# Altium PCB 陈雨笙Test.PcbDoc
Units mil, origin at the board's own origin, x right, y up, seen from the top; angles counter-clockwise.
Board outline 6000 x 4000 mil, 2 copper layers (Top Layer, Bottom Layer); 36 components, 40 nets, 139 pads, 15 vias.
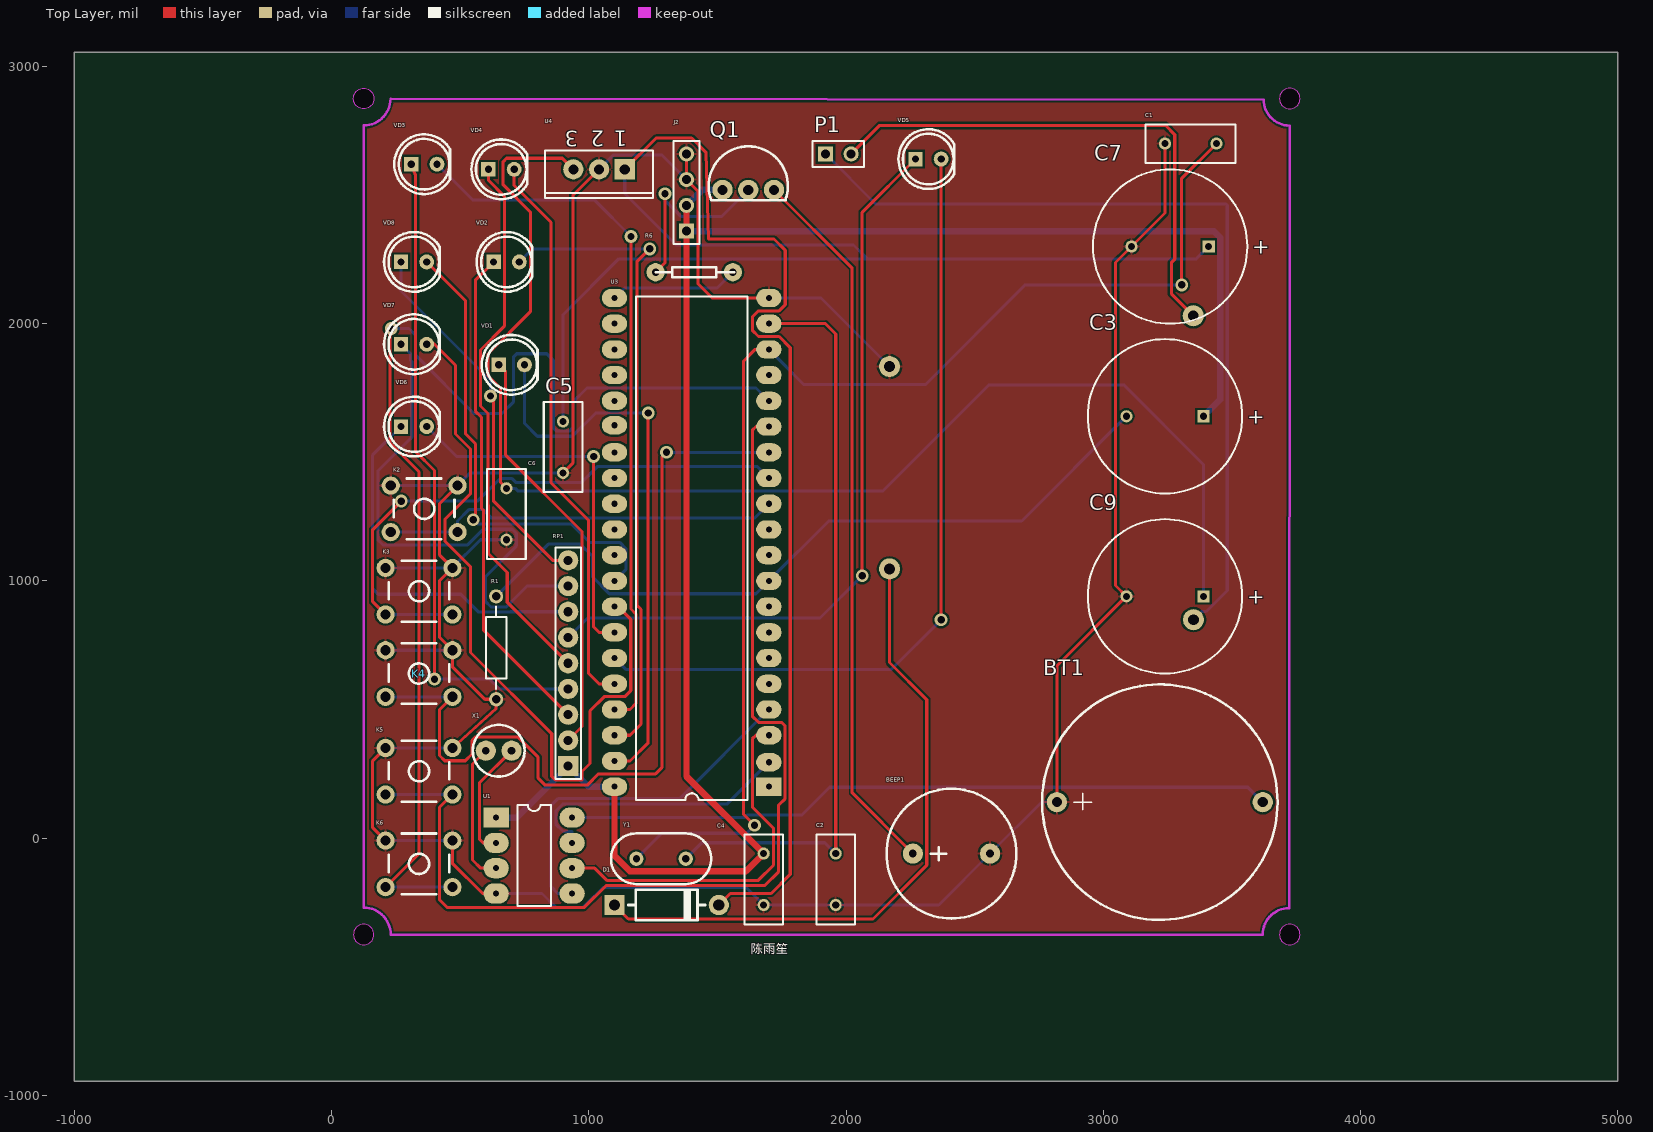
[diagram p0: Top Layer view]
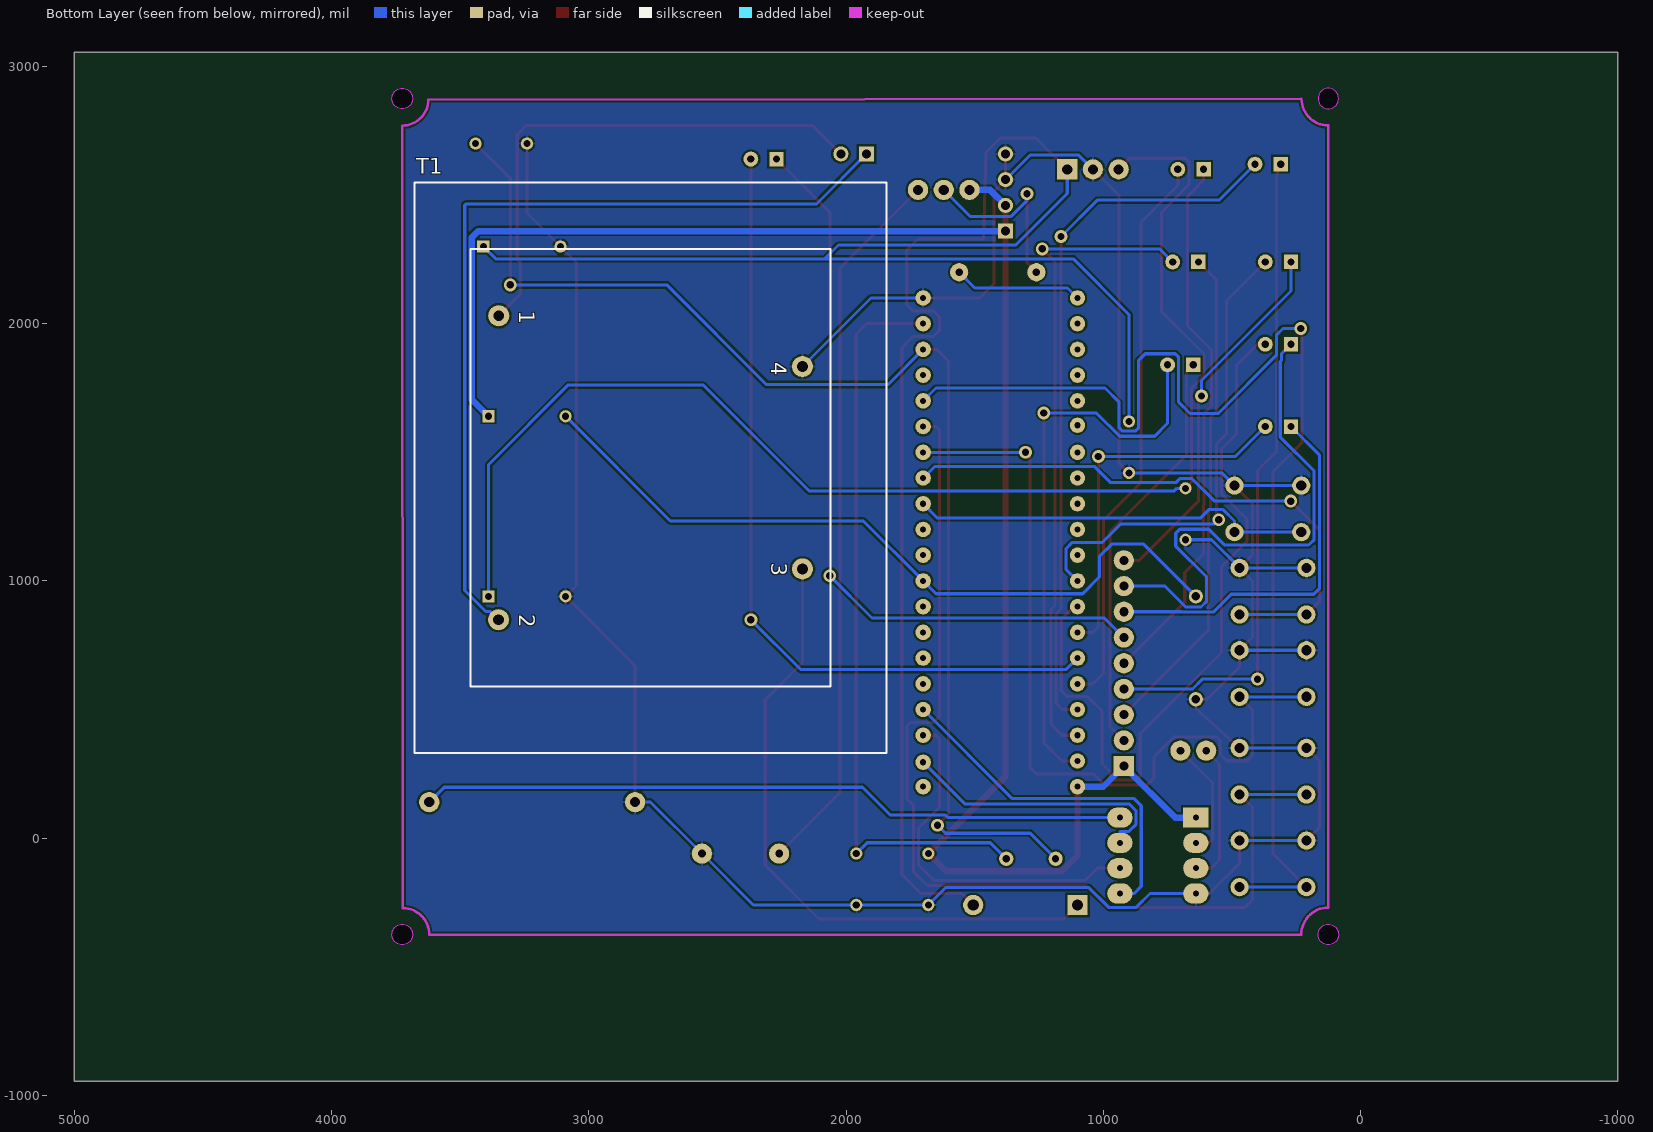
[diagram p1: Bottom Layer view, seen from below]

## Layer stack, top to bottom
Top Layer: signal copper 1.4
Dielectric: dielectric 12.6, FR-4, Dk 4.8
Bottom Layer: signal copper 1.4

## Board outline
-1000,-945 5000,-945 5000,3055 -1000,3055
cut-out: 3685,2875 ccw(c3725,2875) 3725,2835 ccw(c3725,2875) 3765,2875 ccw(c3725,2875) 3725,2915 ccw(c3725,2875)
cut-out: 3685,-375 ccw(c3725,-375) 3725,-415 ccw(c3725,-375) 3765,-375 ccw(c3725,-375) 3725,-335 ccw(c3725,-375)
cut-out: 125,2835 cw(c125,2875) 85,2875 cw(c125,2875) 125,2915 cw(c125,2875) 165,2875 cw(c125,2875)
cut-out: 85,-375 ccw(c125,-375) 125,-415 ccw(c125,-375) 165,-375 ccw(c125,-375) 125,-335 ccw(c125,-375)

## Design rules (kind name [scope] priority, off if disabled: settings)
Clearance [All] p1: gap=8
PolygonConnect [All] p1: connectstyle=Relief reliefconductorwidth=10 reliefentries=4 polygonreliefangle="90 Angle"
RoutingVias [All] p1: holewidth=28 width=50 viastyle="Through Hole" minholewidth=28 minwidth=50 maxholewidth=28 maxwidth=50
SilkscreenOverComponentPads [All] p1: minsilkscreentomaskgap=10
SolderMaskExpansion [All] p1: expansion=4
Width Width_1 [InNet('VCC')] p1: maxlimit=25 minlimit=25 preferedwidth=25
Width [All] p2: maxlimit=12 minlimit=12 preferedwidth=12
27 further rules are at their usual default settings.

## Classes and differential pairs
net class P[1..5]: P1 P2 P3 P4 P5
net class D[1..8]: D1 D2 D3 D4 D5 D6 D7 D8
component class U_STM89C52: BEEP1 C1 C2 C3 C4 J2 Q1 R1 R6 U3 Y1
component class U_Power: C5 C6 C7 C9 D1 P1 T1 U4
component class U_LED: RP1 VD1 VD2 VD3 VD4 VD5 VD6 VD7 VD8
component class U_Keys: K2 K3 K4 K5 K6
component class U_DS1302: BT1 U1 X1

## Components (designator, comment, footprint, x,y, rotation, side; value= is the part's Value field where it differs from the comment)
BEEP1 "BEEP" BEEP 2260,-60 r0 top
BT1 "Battery" BT 2820,140 r0 top
C1 "Cap" RAD-0.2 3340,2700 r180 top
C2 "Cap" RAD-0.2 1960,-160 r270 top
C3 "Cap Pol1" RB7.6-15 3240,1640 r0 top
C4 "Cap" RAD-0.2 1680,-160 r90 top
C5 "Cap" RAD-0.2 900,1520 r90 top
C6 "Cap" RAD-0.2 680,1260 r90 top
C7 "Cap Pol1" RB7.6-15 3260,2300 r0 top
C9 "Cap Pol1" RB7.6-15 3240,940 r0 top
D1 "1N5817" DO-15 1100,-260 r0 top
J2 "XH2.54-4P" HDR1X4 1380,2360 r90 top
K2 "KEY" TACK6 360,1280 r0 top
K3 "KEY" TACK6 340,960 r0 top
K4 "KEY" TACK6 340,640 r0 top
K5 "KEY" TACK6 340,260 r0 top
K6 "KEY" TACK6 340,-100 r0 top
P1 "Header 2" HDR1X2 1920,2660 r0 top
Q1 "8550" PNP 1620,2520 r0 top
R1 "10K" AXIAL-0.4 640,740 r90 top
R6 "100K" RES 1560,2200 r180 top
RP1 "330" SIP9 920,280 r90 top
T1 "Trans Cupl" TRF_4 2760,1440 r270 bottom
U1 "DS1302" DIP8 640,80 r0 top
U3 "STC89C52" DIP40 1700,200 r180 top
U4 "LM7805CT" T03B 1040,2600 r180 top
VD1 "BT101" LED-5 700,1840 r0 top
VD2 "BT101" LED-5 680,2240 r0 top
VD3 "BT101" LED-5 360,2620 r0 top
VD4 "BT101" LED-5 660,2600 r0 top
VD5 "BT101" LED-5 2320,2640 r0 top
VD6 "BT101" LED-5 320,1600 r0 top
VD7 "BT101" LED-5 320,1920 r0 top
VD8 "BT101" LED-5 320,2240 r0 top
X1 "32.768k" XTAL2 600,340 r0 top
Y1 "12MHZ" XT12M 1280,-80 r180 top

## Footprints (in the part's own frame and the unit in brackets; to place one, negate y for a bottom-side part, rotate by r counter-clockwise, add the part's x,y. Pads: shape width x height; smd on the part's side, far side on the other; paste and mask are expansions set on the pad)
AXIAL-0.4 [mm]
  round 1.4 hole 0.85: 1(-5.08,0) 2(5.08,0)
  silkscreen extent -4.06,-1.02 4.06,1.02
BEEP [mm]
  round 2 hole 0.762: 1(0,0) 2(7.62,0)
  silkscreen extent -2.6,-6.41 10.22,6.41
BT [mm]
  round 2 hole 1: 1(0,0) 2(20.32,0)
  silkscreen extent -1.46,-11.62 21.78,11.62
DIP8 [mm]
  rect 2.5x2 hole 0.6: 1(0,0)
  oval 2.5x2 hole 0.6: 2(0,-2.5) 3(0,-5) 4(0,-7.5) 5(7.5,-7.5) 6(7.5,-5) 7(7.5,-2.5) 8(7.5,0)
  silkscreen extent 2.08,-8.75 5.42,1.25
DIP40 [mm]
  rect 2.5x1.8 / inner round 1.524 / far side round 1.524 hole 0.6: 1(0,0)
  oval 2.5x1.8 / inner round 1.524 / far side round 1.524 hole 0.6: 2(0,-2.413) 3(0,-5.08) 4(0,-7.62) 5(0,-10.16) 6(0,-12.7) 7(0,-15.24) 8(0,-17.78) 9(0,-20.32) 10(0,-22.86) 11(0,-25.4) 12(0,-27.94) 13(0,-30.48) 14(0,-33.02) 15(0,-35.56) 16(0,-38.1) 17(0,-40.64) 18(0,-43.18) 19(0,-45.72) 20(0,-48.26) 21(15.24,-48.26) 22(15.24,-45.72) 23(15.24,-43.18) 24(15.24,-40.64) 25(15.24,-38.1) 26(15.24,-35.687) 27(15.24,-33.02) 28(15.24,-30.48) 29(15.24,-27.94) 30(15.24,-25.4) 31(15.24,-22.86) 32(15.24,-20.32) 33(15.24,-17.78) 34(15.24,-15.24) 35(15.24,-12.7) 36(15.24,-10.16) 37(15.24,-7.62) 38(15.24,-5.08) 39(15.24,-2.54) 40(15.24,0)
  silkscreen extent 2.08,-48.39 13.11,1.29
DO-15 [mm]
  rect 2x2 hole 1.1: A(0,0)
  round 2 hole 1.1: K(10.3,0)
  silkscreen extent 1.34,-1.52 8.96,1.52, body extent -0.34,-1.65 10.76,1.65, height 3.35
HDR1X2 [mm]
  rect 1.5x1.5 hole 0.9: 1(0,0)
  round 1.5 hole 0.9: 2(2.54,0)
  silkscreen extent -1.27,-1.27 3.81,1.27
HDR1X4 [mm]
  rect 1.5x1.5 hole 0.9: 1(0,0)
  round 1.5 hole 0.9: 2(2.54,0) 3(5.08,0) 4(7.62,0)
  silkscreen extent -1.27,-1.27 8.89,1.27
LED-5 [mil]
  rect 56x56 hole 28: 1(-50,0)
  round 58 hole 28: 2(50,0)
  silkscreen extent -116,-116 101,116
PNP [mm]
  round 2 hole 1: 1(-2.54,0) 2(0,0) 3(2.54,0)
  silkscreen extent -3.92,-1.01 3.92,4.3
RAD-0.2 [mm]
  round 1.2 hole 0.7: 1(-2.54,0) 2(2.54,0)
  silkscreen extent -4.44,-1.91 4.44,1.91
RB7.6-15 [mm]
  rect 1.2x1.2 hole 0.7: 1(3.81,0)
  round 1.2 hole 0.7: 2(-3.81,0)
  silkscreen extent -7.62,-7.62 7.62,7.62
RES [mm]
  round 1.8 hole 0.762: 1(0,0) 2(7.62,0)
  silkscreen extent -0.13,-0.51 7.62,0.51
SIP9 [mm]
  rect 2x2 hole 0.9: 1(0,0)
  round 2 hole 0.9: 2(2.54,0) 3(5.08,0) 4(7.62,0) 5(10.16,0) 6(12.7,0) 7(15.24,0) 8(17.78,0) 9(20.32,0)
  silkscreen extent -1.27,-1.27 21.59,1.27
T03B [mm]
  rect 2x2 hole 1: 1(-2.54,0)
  round 2 hole 1: 2(0,0) 3(2.54,0)
  silkscreen extent -5.35,-1.85 5.35,2.85
TACK6 [mm]
  round 1.8 hole 1: 1(-3.3,2.3) 1(3.3,2.3) 2(-3.3,-2.3) 2(3.3,-2.3)
  silkscreen extent -3,-3 3,3
TRF_4 [mil]
  round 82 hole 42: 1(-590.83,-590) 2(590.83,-590.83) 3(393.33,590.83) 4(-393.33,590.83)
  silkscreen extent -1108,-917 1108,917
XT12M [mm]
  round 1.4 hole 0.7: 1(-2.467,0) 2(2.413,0)
  silkscreen extent -4.96,-2.5 4.91,2.5
XTAL2 [mm]
  round 2 hole 0.762: 1(0,0) 2(2.54,0)
  silkscreen extent -1.29,-2.55 3.83,2.55

## Part data
C1 C2 C4 C5 C6: "Capacitor"
C3 C7 C9: "Polarized Capacitor (Radial)"
D1: "普通二极管"
J2: library part "Header 4", "Header, 4-Pin"
K2 K3 K4 K5 K6: "Switch"
P1: "Header, 2-Pin"
Q1: library part PNP
R1: library part Res2, "Resistor"
R6: library part Res
RP1: library part SIP-A09
T1: "Transformer (Coupled Inductor Model)"
U4: "Series 3-Terminal Positive Regulator"
VD1 VD2 VD3 VD4 VD5 VD6 VD7 VD8: library part LED0, "Typical INFRARED GaAs LED"
X1: library part XTAL_2
Y1: library part XTAL, "Crystal Oscillator"

## Via types
v1: diameter 50, hole 28, Top Layer to Bottom Layer, 15 vias

## Nets (pads, with @x,y where several pads share a name; then routed paths per layer and width w, separated by ;. In a path a pad name is that pad's centre, name@x,y a point inside that pad or via, vN(x,y) a via of type N, cw(c..) or ccw(c..) an arc to the next point about the centre after c; other vN are vias at no path point)
BEEP: R6.1 U3.21 | length 501.4
  Bottom Layer w12: U3.21 1139,2139 1499,2139 R6.1
D1: U3.39 VD1.2 | length 2209.3
  Top Layer w12: U3.39 1160,300 1231,371 v1(1231,1653)
  Bottom Layer w12: VD1.2 750,1612.38 800,1562.38 936.38,1562.38 1027,1653 v1(1231,1653)
D2: U3.38 VD2.2 | length 2524.5
  Top Layer w12: U3.38 1160,400 1203.21,443.21 1203.21,889.43 1187,905.65 1187,2241 v1(1237,2291)
  Bottom Layer w12: VD2.2 781,2291 v1(1237,2291)
D3: U3.37 VD3.2 | length 2787
  Top Layer w12: U3.37 1160,500 1183.21,523.21 1183.21,871.5 1164,890.72 v1(1164,2339)
  Bottom Layer w12: VD3.2 550,2480 1023,2480 v1(1164,2339)
D4: U3.36 VD4.2 | length 2196.7
  Top Layer w12: VD4.2 710,2537 853,2394 853,1382 999,1236 999,641 1040,600 U3.36
D5: U3.35 VD5.2 | length 3159.2
  Top Layer w12: v1(2370,849) VD5.2
  Bottom Layer w12: U3.35 1144,656 2177,656 v1(2370,849)
D6: U3.34 VD6.2 | length 1449.7
  Top Layer w12: v1(1019,1484) 1019,821 1040,800 U3.34
  Bottom Layer w12: VD6.2 486,1484 v1(1019,1484)
D7: U3.33 VD7.2 | length 2938.7
  Top Layer w12: VD7.2 400,1920 482,1838 482,1571 540,1513 540,1338.4 440.49,1238.88 440.49,1155 540,1055.49 540,722 856,406 856,240 870,226 974,226 974,259 1005,290 1005,495 1060,550 1140,550 1163.21,573.21 1163.21,850.79 1114,900 U3.33
D8: U3.32 VD8.2 | length 1868
  Top Layer w12: VD8.2 521,2089 521,1572 560,1533 560,1247 v1(551,1238)
  Bottom Layer w12: v1(551,1238) 567,1222 931,1222 1003,1150 1120,1150 1144,1126 1144,1044 U3.32
GND: BEEP1.2 BT1.1 C1.2 C2.2 C4.1 C5.1 C6.1 C7.2 C9.2 J2.3 J2.4 K2.1 K3.1 K4.1 K5.1 K6.1 R1.1 T1.4 U1.4 U3.20 U4.2 | length 12214.2
  Top Layer w12: K6.1@210.08,-9.45 160,40.63 160,300.47 K5.1@210.08,350.55 ; K6.1@469.92,-9.45 469.92,-97.92 587.28,-215.28 U1.4 ; K5.1@469.92,350.55 640,504 R1.1 596,540 469.92,666.08 469.92,730.55 420,780.47 420,1000.63 469.92,1050.55 420.49,1099.99 420.49,1301.12 K2.1@489.92,1370.55 ; C5.1 938,1458 938,2498 U4.2 ; J2.4 J2.3 1424,2516 1424,2156 1480,2100 U3.20 ; BT1.1 2820,670 C9.2 3048,982 3048,2238 C7.2 3240,2430 C1.2
  Bottom Layer w12: K6.1@210.08,-9.45 K6.1@469.92,-9.45 ; K5.1@210.08,350.55 K5.1@469.92,350.55 ; K4.1@210.08,730.55 K4.1@469.92,730.55 ; K3.1@210.08,1050.55 469.92,1050.55 579.37,1160 C6.1 ; K2.1@230.08,1370.55 489.92,1370.55 539.37,1420 C5.1 ; U1.4 818.28,-215.28 872,-269 979,-269 1056,-192 1612,-192 C4.1 C2.2 2360,-260 BEEP1.2 2760,140 BT1.1 ; U4.2 1095,2655 1285,2655 J2.3 ; U3.20 1902.5,2100 T1.4
NetBEEP1_1: BEEP1.1 Q1.3 | length 2803.7
  Top Layer w12: Q1.3 2024,2216 2024,176 BEEP1.1
NetBT1_2: BT1.2 U1.8 | length 2757.6
  Bottom Layer w12: U1.8 1604.41,80 1614.35,89.94 1827.94,89.94 1936,198 3562,198 BT1.2
NetC5_2: C5.2 C7.1 D1.K U4.1 | length 9459.3
  Top Layer w12: U4.1 1262,2722 1400,2722 1455,2667 1466,2329 1720,2329 1764,2285 1764,2074 1740,2050 1660,2050 1636,2026 1636,1974 1660,1950 1740,1950 1783.21,1906.79 1783.21,-140.79 1708.94,-215.06 1550.45,-215.06 D1.K
  Bottom Layer w12: C5.2 900,2035 1117,2252 2083,2252 ; U4.1 1140,2506 1340,2306 2029,2306 2083,2252 ; C7.1 3362,2252 ; 2083,2252 3362,2252 ; 2083,2252 3362,2252
NetC6_2: C6.2 C9.1 U4.3 | length 5233.5
  Top Layer w12: C6.2 657,1383 657,1749 608,1798 608,1882 773,2047 773,2434 667,2540 667,2630 680,2643 897,2643 U4.3
  Bottom Layer w12: C6.2 714,1360 724,1350 2144,1350 2556,1762 3080,1762 3390,1452 C9.1
NetD1_A: D1.A T1.3 | length 2534.6
  Top Layer w12: D1.A 1154,-314 2105,-314 2314,-105 2314,538 2169.17,682.83 T1.3
NetP1_1: P1.1 T1.2 | length 3320.7
  Bottom Layer w12: P1.1 2115,2465 3478,2465 3482,2461 3482,963 3400,881 3382.67,881 T1.2
NetP1_2: P1.2 T1.1 | length 2062.8
  Top Layer w12: P1.2 2131,2771 3242,2771 3278,2735 3278,2251 3266,2239 3266,2114.83 T1.1
NetQ1_2: Q1.2 R6.2 | length 738.5
  Top Layer w12: R6.2 1296,2236 v1(1296,2505)
  Bottom Layer w12: v1(1296,2505) 1296,2480 1360,2416 1516,2416 Q1.2
NetRP1_2: RP1.2 VD1.1 | length 1616.6
  Top Layer w12: VD1.1 677,1813 677,1489 974,1192 974,434 RP1.2
NetRP1_3: RP1.3 VD2.1 | length 1938.9
  Top Layer w12: VD2.1 559,2169 559,1660 583.17,1635.83 583.17,1281.83 590,1275 590,810 RP1.3
NetRP1_4: RP1.4 VD3.1 | length 2571.2
  Top Layer w12: VD3.1 327,2577 327,1502 400,1429 v1(400,618)
  Bottom Layer w12: v1(400,618) 615,618 653,580 RP1.4
NetRP1_5: RP1.5 VD4.1 | length 2125.4
  Top Layer w12: VD4.1 610,2557 672,2495 672,1990.5 579,1897.5 579,1680 608,1651 608,1297 610,1295 610,1106 683,1033 683,917 RP1.5
NetRP1_6: RP1.6 VD5.1 | length 2948.2
  Top Layer w12: v1(2063,1020) 2063,2433 VD5.1
  Bottom Layer w12: RP1.6 996,856 1899,856 v1(2063,1020)
NetRP1_7: RP1.7 VD6.1 | length 1474.1
  Bottom Layer w12: VD6.1 160,1490 160,970 182,948 502.66,948 572.22,878.44 695,878.44 696.56,880 RP1.7
NetRP1_8: RP1.8 VD7.1 | length 2089.4
  Bottom Layer w12: VD7.1 307,1883 307,1857 312,1852 312,1559 180,1427 180,1160.02 200,1140.02 529.02,1140.02 590,1201 702,1201 718,1185 718,1135 598,1015 598,920.44 620,898.44 679.44,898.44 761,980 RP1.8
NetRP1_9: RP1.9 VD8.1 | length 1464.4
  Top Layer w12: v1(618,1719) 629,1708 629,1311 860,1080 RP1.9
  Bottom Layer w12: VD8.1 270,2127 618,1779 v1(618,1719)
NetU1_2: U1.2 X1.2 | length 465.9
  Top Layer w12: U1.2 589.43,-18.43 576,-5 576,216 X1.2
NetU1_3: U1.3 X1.1 | length 551.7
  Top Layer w12: X1.1 548,288 548,-85 579.85,-116.85 U1.3
NetU1_5: U1.5 U3.4 | length 1410.6
  Bottom Layer w12: U1.5 880,-215.28 852.06,-187.34 852.06,125.43 880,153.37 1353.37,153.37 U3.4
NetU1_6: U1.6 U3.3 | length 1421.5
  Top Layer w12: U1.6 1023,-116.85 1070.15,-164 1659,-164 1718,-105 1718,39 1636,121 1636,386 1650,400 U3.3
NetU1_7: U1.7 U3.2 | length 1077.2
  Bottom Layer w12: U1.7 935.28,26.63 900,26.63 872.06,54.57 872.06,105.43 900,133.37 1538.37,133.37 U3.2
P1: K2.2 U3.12 | length 1568.8
  Bottom Layer w12: K2.2@230.08,1189.45 489.92,1189.45 489.92,1233.2 533.82,1277.1 589.72,1277.1 622.82,1244 1644,1244 U3.12
P2: K3.2 U3.13 | length 2282.8
  Top Layer w12: K3.2@210.08,869.45 160,919.53 160,1199 v1(271,1310)
  Bottom Layer w12: K3.2@210.08,869.45 K3.2@469.92,869.45 ; v1(271,1310) 567,1310 654.62,1397.62 702.38,1397.62 718,1382 971,1382 1033,1444 1656,1444 U3.13
P3: K4.2 U3.14 | length 3235.8
  Top Layer w12: K4.2@469.92,549.45 420,499.53 420,321 440,301 520,301 546,327 546,380 560,394 724,394 802,316 802,235 831,206 994,206 1038,250 1260,250 1284,274 1284,1482 v1(1302,1500)
  Bottom Layer w12: K4.2@210.08,549.45 K4.2@469.92,549.45 ; v1(1302,1500) U3.14
P4: K5.2 U3.15 | length 3978.6
  Top Layer w12: K5.2@469.92,169.45 420,119.53 420,-240 449,-269 983,-269 1068,-184 1684,-184 1738,-130 1738,128.57 1763.21,153.78 1763.21,435.79 1749,450 1660,450 1636,474 1636,1586 1650,1600 U3.15
  Bottom Layer w12: K5.2@210.08,169.45 K5.2@469.92,169.45
P5: K6.2 U3.16 | length 4809.3
  Top Layer w12: K6.2@210.08,-190.55 340,-60.63 340,1424 228,1536 228,1977 v1(232,1981)
  Bottom Layer w12: K6.2@210.08,-190.55 K6.2@469.92,-190.55 ; v1(232,1981) 301,1981 327,1955 327,1877 553,1651 663,1651 707,1695 707,1870 720,1883 837,1883 862.38,1857.62 862.38,1595 875,1582.38 925.38,1582.38 938,1595 938,1695 993,1750 1650,1750 U3.16
RESET: C3.2 R1.2 U3.9 | length 2946.7
  Bottom Layer w12: R1.2 843,1143 967,1143 1015,1095 1015,1015 1080,950 1650,950 U3.9 1933,1233 2683,1233 C3.2
VCC: C3.1 C4.2 J2.1 J2.2 Q1.1 RP1.1 U1.1 U3.40 | length 7094.8
  Top Layer w25: U3.40 1100,-69 1160,-129 1611,-129 C4.2 1380,240 J2.1 J2.2
  Bottom Layer w25: U1.1 720,80 RP1.1 1000,200 U3.40 ; J2.1 3430,2360 3455,2335 3455,1705 C3.1 ; J2.2 1440,2520 Q1.1
XTAL1: C2.1 U3.19 Y1.1 | length 2922.5
  Top Layer w12: U3.19 1920,2000 1960,1960 C2.1
  Bottom Layer w12: Y1.1 1439.13,-18 1918,-18 C2.1
XTAL2: C1.1 U3.18 Y1.2 | length 4879.3
  Top Layer w12: v1(1644,50) 1602,92 1602,1855 1647,1900 U3.18 ; v1(3305,2151) 3305,2565 C1.1
  Bottom Layer w12: Y1.2 1284,19 1613,19 v1(1644,50) ; U3.18 1837,1763 2309,1763 2697,2151 v1(3305,2151)
pads on no net: U3.1 U3.5 U3.6 U3.7 U3.8 U3.10 U3.11 U3.17 U3.22 U3.23 U3.24 U3.25 U3.26 U3.27 U3.28 U3.29 U3.30 U3.31

## Polygon pours and split planes (outlines as drawn)
GND on Top Layer "Keep-Out Layer-No Net" (solid, remove dead copper): 125,2770.6 124.88,2770.48 124.88,-269.88 145.12,-269.88 150,-265 155,-270 160,-270 170,-280 170,-285 175,-285 200,-310 205,-310 205,-315 210,-320 220,-330 230,-340 230,-345 230,-360 230,-375 3620,-375 3620,-355 3620,-340 3625,-335 3630,-330 3645,-315 3650,-310 3650,-305 3660,-295 3670,-285 3675,-285 3680,-280 3690,-280 3695,-275 3705,-275 3708.08,-271.92 3723.08,-271.92 3725,-270 3725,2770 3715,2770 3710,2775 3705,2775 3700,2775 3695,2780 3690,2785 3680,2785 3675,2790 3665,2800 3655,2800 3645,2810 3635,2820 3635,2825 3635,2835 3630,2840 3620,2850 3620,2855 3620,2867.48 3623.76,2871.24 3620,2875 229.4,2875 229.4,2865.6 230,2865 230,2855 230,2850 225,2845 225,2840 220,2835 220,2830 215,2825 210,2820 205,2815 200,2810 200,2805 195,2805 190,2800 185,2795 180,2790 175,2785 170,2785 160,2785 155,2780 150,2775 145,2775 129.4,2775 125,2770.6
GND on Bottom Layer "Keep-Out Layer-No Net" (solid, remove dead copper): 125,2770.6 124.88,2770.48 124.88,-269.88 149.88,-269.88 155,-275 160,-275 165,-275 170,-280 170,-285 175,-285 185,-295 190,-295 205,-310 210,-310 215,-315 215,-325 215,-340 220,-345 225,-350 225,-370 230,-375 3620,-375 3620,-360 3620,-355 3625,-350 3625,-345 3625,-335 3630,-330 3630,-325 3630,-320 3635,-315 3640,-310 3650,-300 3655,-295 3660,-295 3670,-295 3680,-285 3685,-280 3710,-280 3715,-275 3718.08,-271.92 3723.08,-271.92 3723.08,2759.8 3724.99,2761.71 3725,2761.72 3725,2770 3720,2770 3715,2775 3700,2775 3690,2775 3675,2790 3670,2795 3660,2795 3660,2800 3655,2805 3635,2825 3635,2830 3625,2840 3620,2845 3620,2867.48 3623.76,2871.24 3620,2875 229.4,2875 229.4,2864.4 225,2860 225,2850 220,2845 220,2835 220,2830 215,2825 210,2820 210,2815 210,2810 205,2805 195,2795 190,2795 185,2795 180,2790 170,2780 165,2780 155,2780 145,2770 135,2770 115,2770 115.6,2770.6 125,2770.6

## Keep-outs
Keep-Out Layer:
  lines w10: 124.88,-269.88 cw(c124.88,-375) 230,-375 3620,-375 cw(c3723.08,-375) 3723.08,-271.92 3725,2770 cw(c3725,2871.24) 3623.76,2871.24 229.4,2875 cw(c125,2875) 125,2770.6 124.88,-269.88

## Silkscreen, mask and mechanical layers (free items; w line width, h text height)
Top Overlay:
  text "陈雨笙" at 1630,-460 h60
Mechanical 1:
  circle w10: c3725,2875 r40
  circle w10: c125,2875 r40
  circle w10: c125,-375 r40
  circle w10: c3725,-375 r40
  lines w10: 0,-500 0,3000 3850,3000 3850,-500 0,-500

## Dimensions
-50,-340 to -70,-420 on Mechanical 1
3925,3000 to 3905,-500 on Mechanical 1
0,-545 to 3850,-545 on Mechanical 1

## Text inside footprints (layer, text, board x,y; h text height)
C3: Top Overlay "+" at 3560.15,1610.99 h59.06
C7: Top Overlay "+" at 3580.15,2270.99 h59.06
C9: Top Overlay "+" at 3560.15,910.99 h59.06
T1: Bottom Overlay "1" at 3270,2050.83 h59.06 r90; Bottom Overlay "2" at 3270,870.83 h59.06 r90; Bottom Overlay "4" at 2290,1850.83 h59.06 r90; Bottom Overlay "3" at 2290,1070.83 h59.06 r90
U4: Top Overlay "3" at 959.68,2750.59 h59.06 r180; Top Overlay "1" at 1149.84,2750.59 h59.06 r180; Top Overlay "2" at 1059.68,2750.59 h59.06 r180